# Altium PCB STM32_Board_1.PcbDoc
Units mm, origin at the board's own origin, x right, y up, seen from the top; angles counter-clockwise.
Board outline 39.24 x 39.7 mm, 4 copper layers (L1 (Signal), L2 (GND), L3 (GND), L4 (Signal)), stack 1.57 mm thick; 36 components, 28 nets, 172 pads, 44 vias.
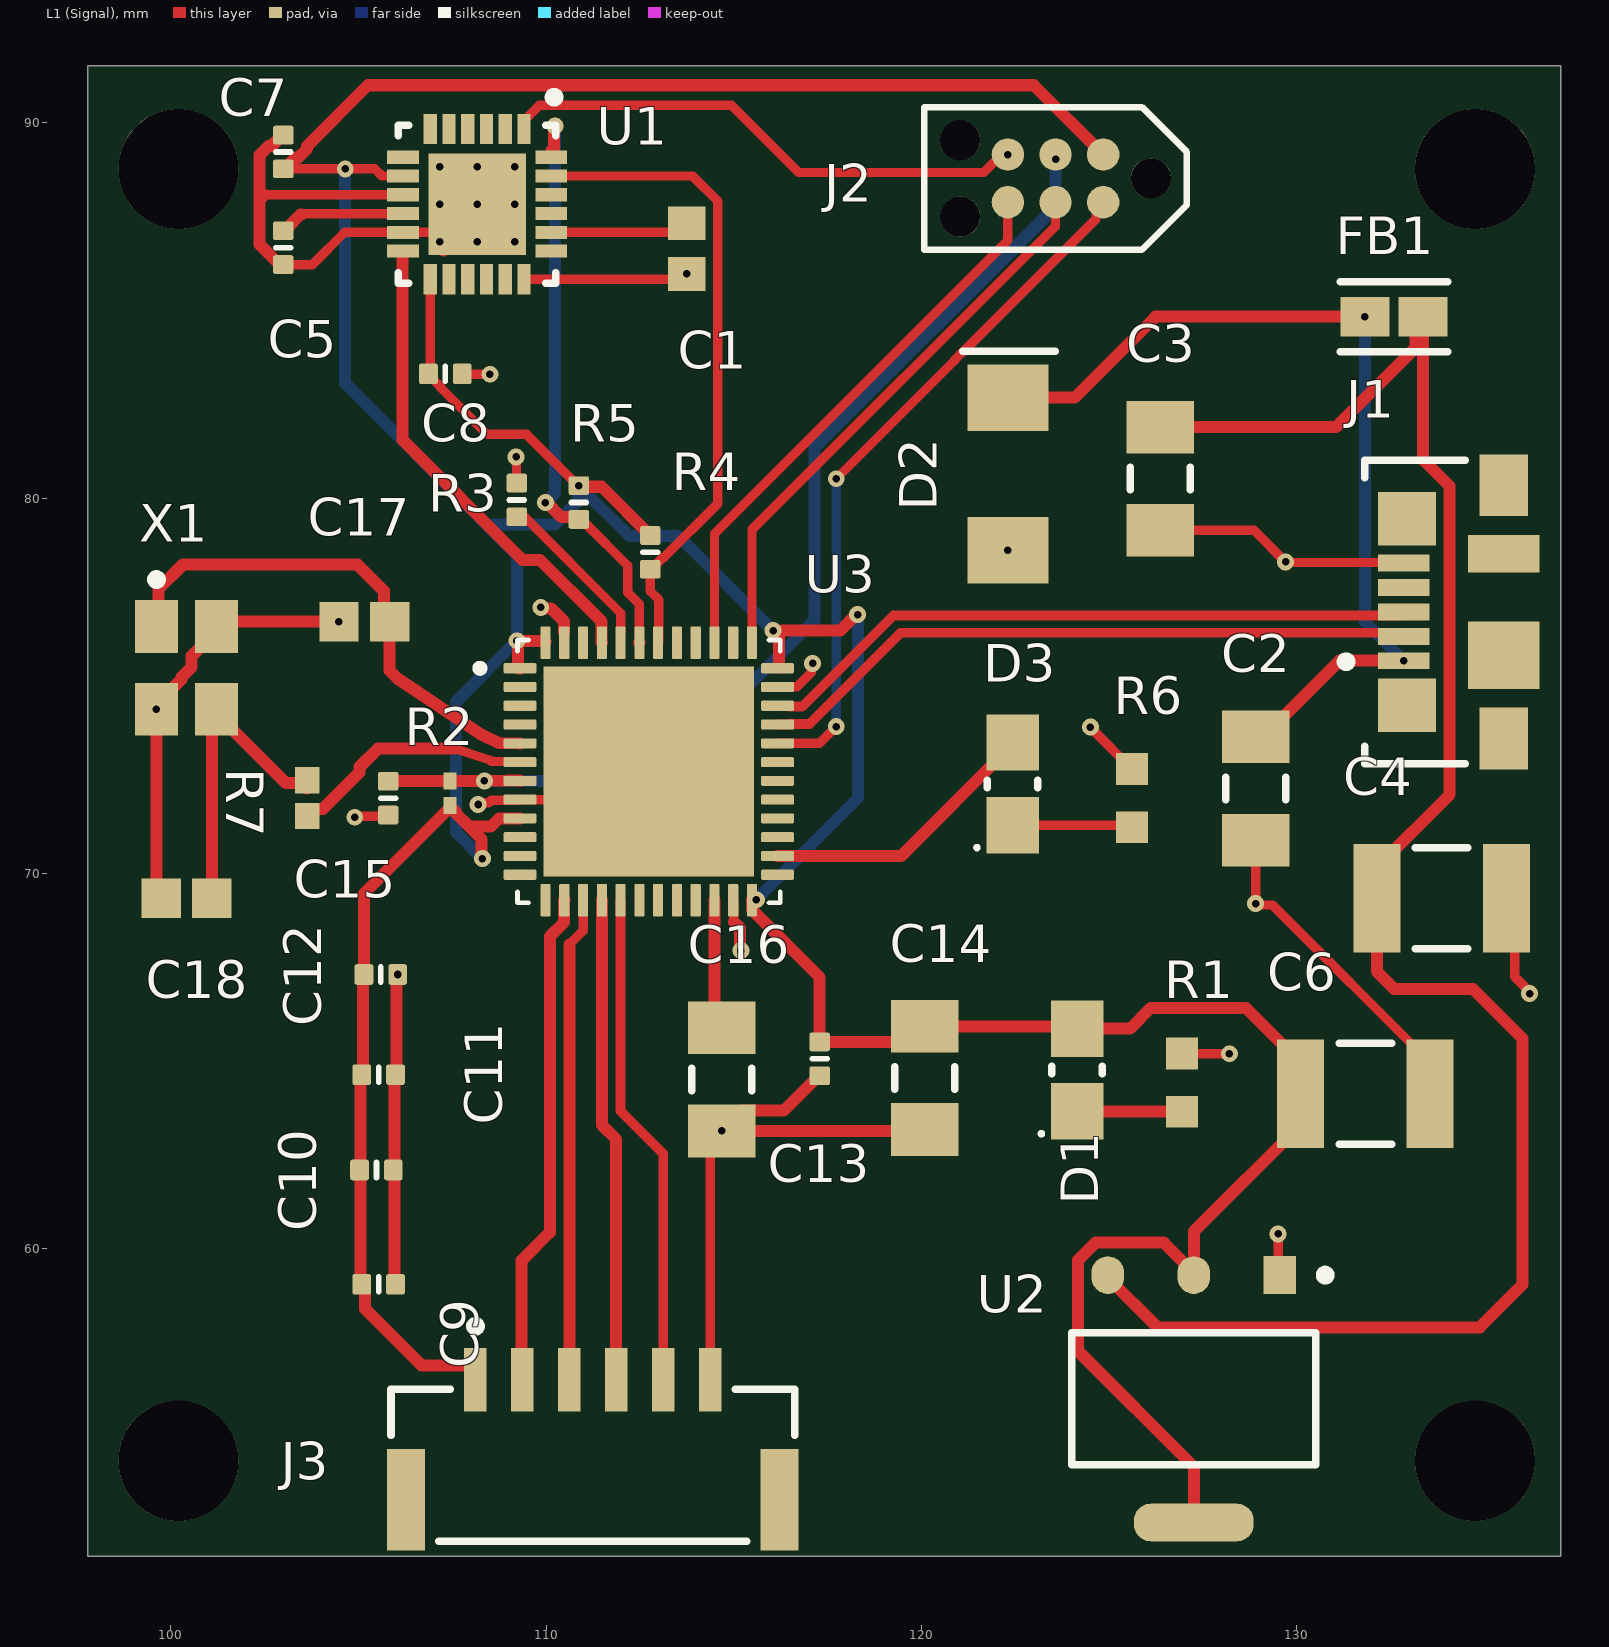
[diagram p0: L1 (Signal) view]
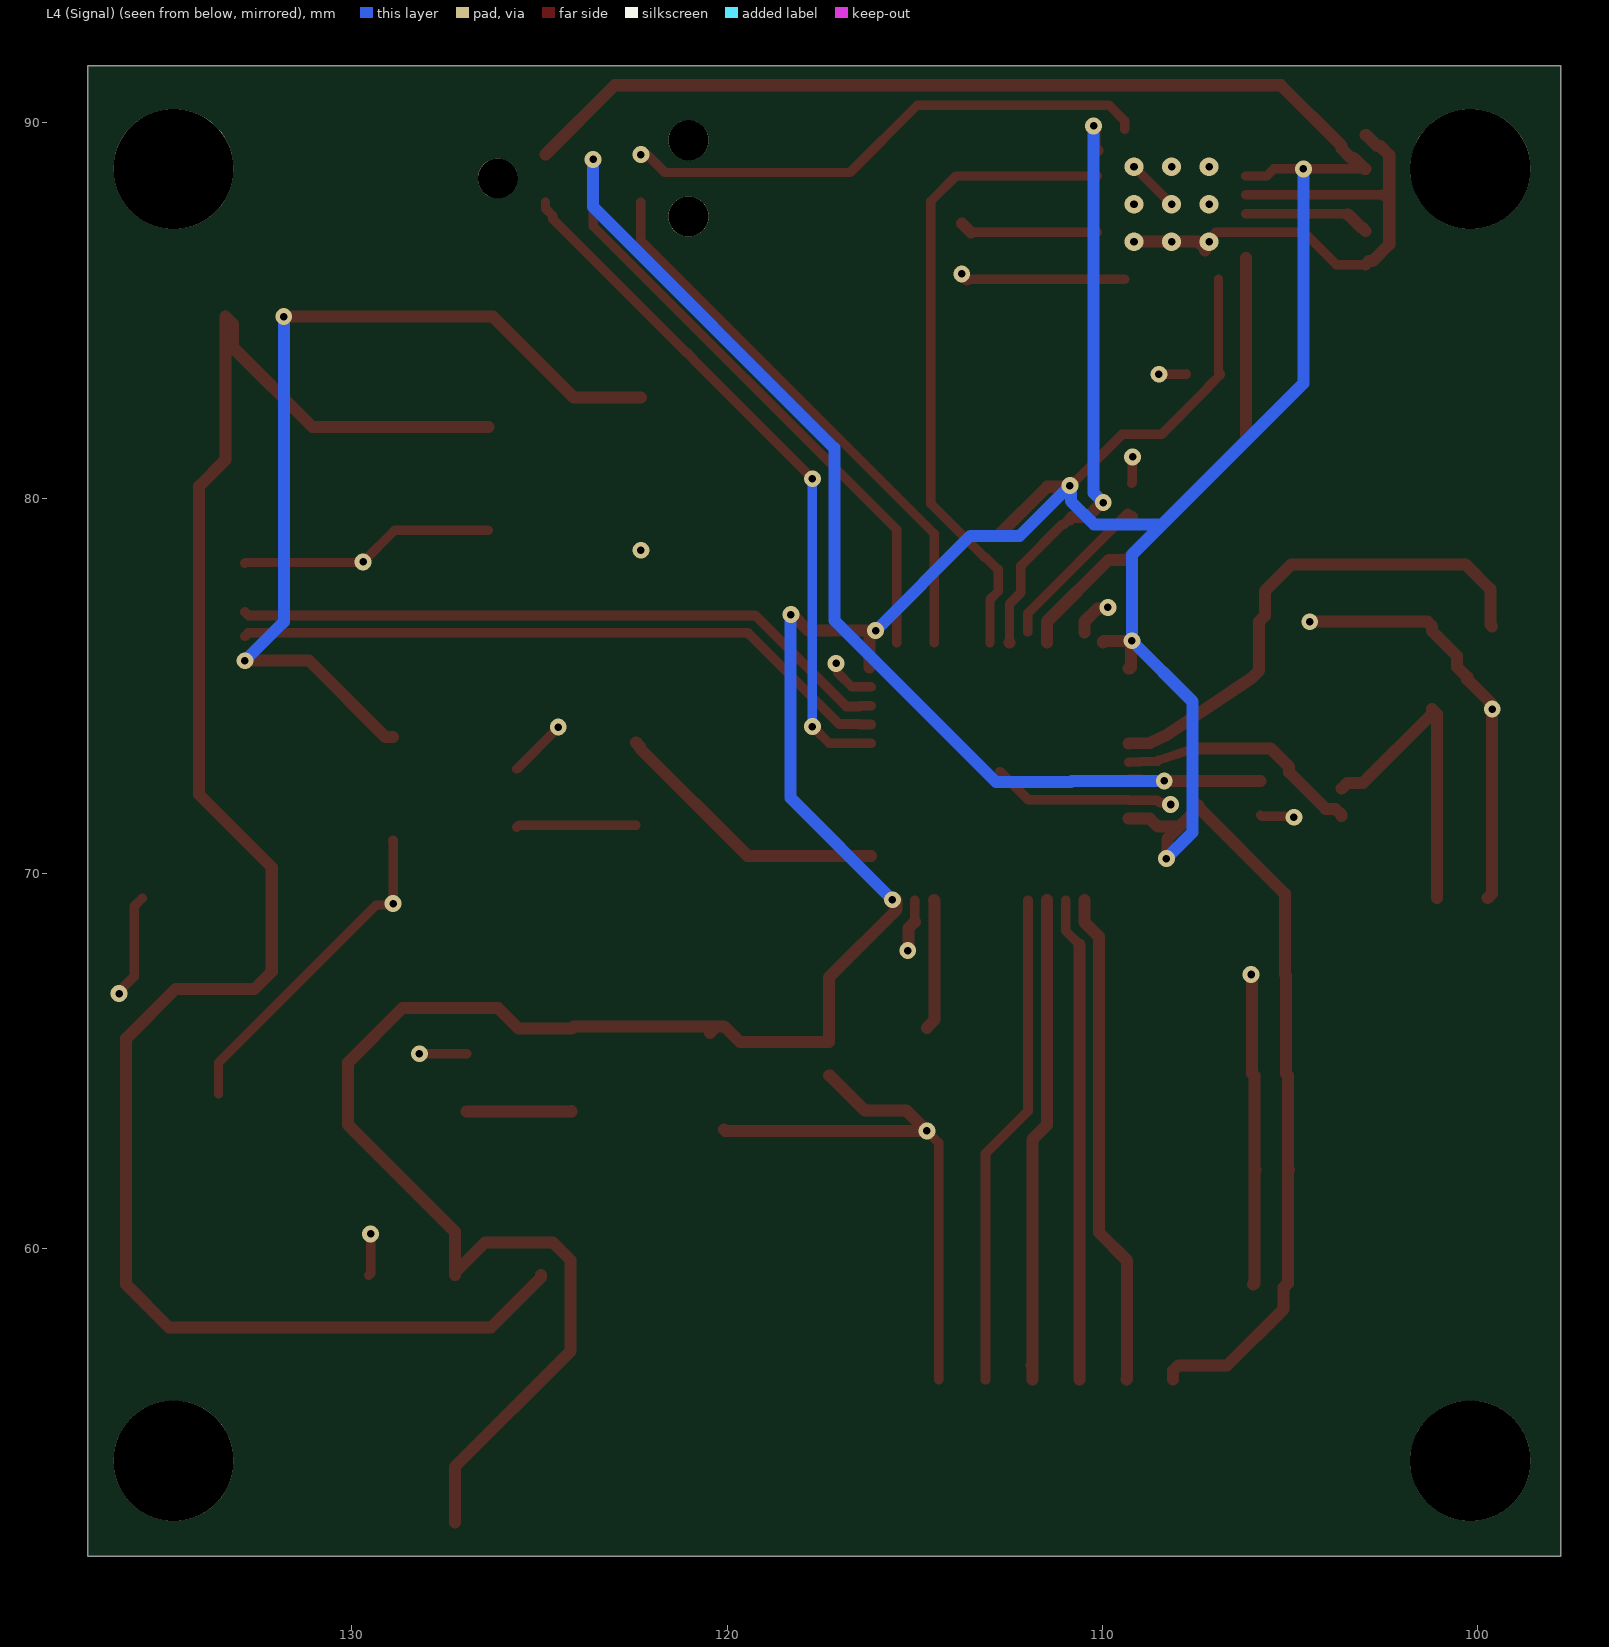
[diagram p1: L4 (Signal) view, seen from below]
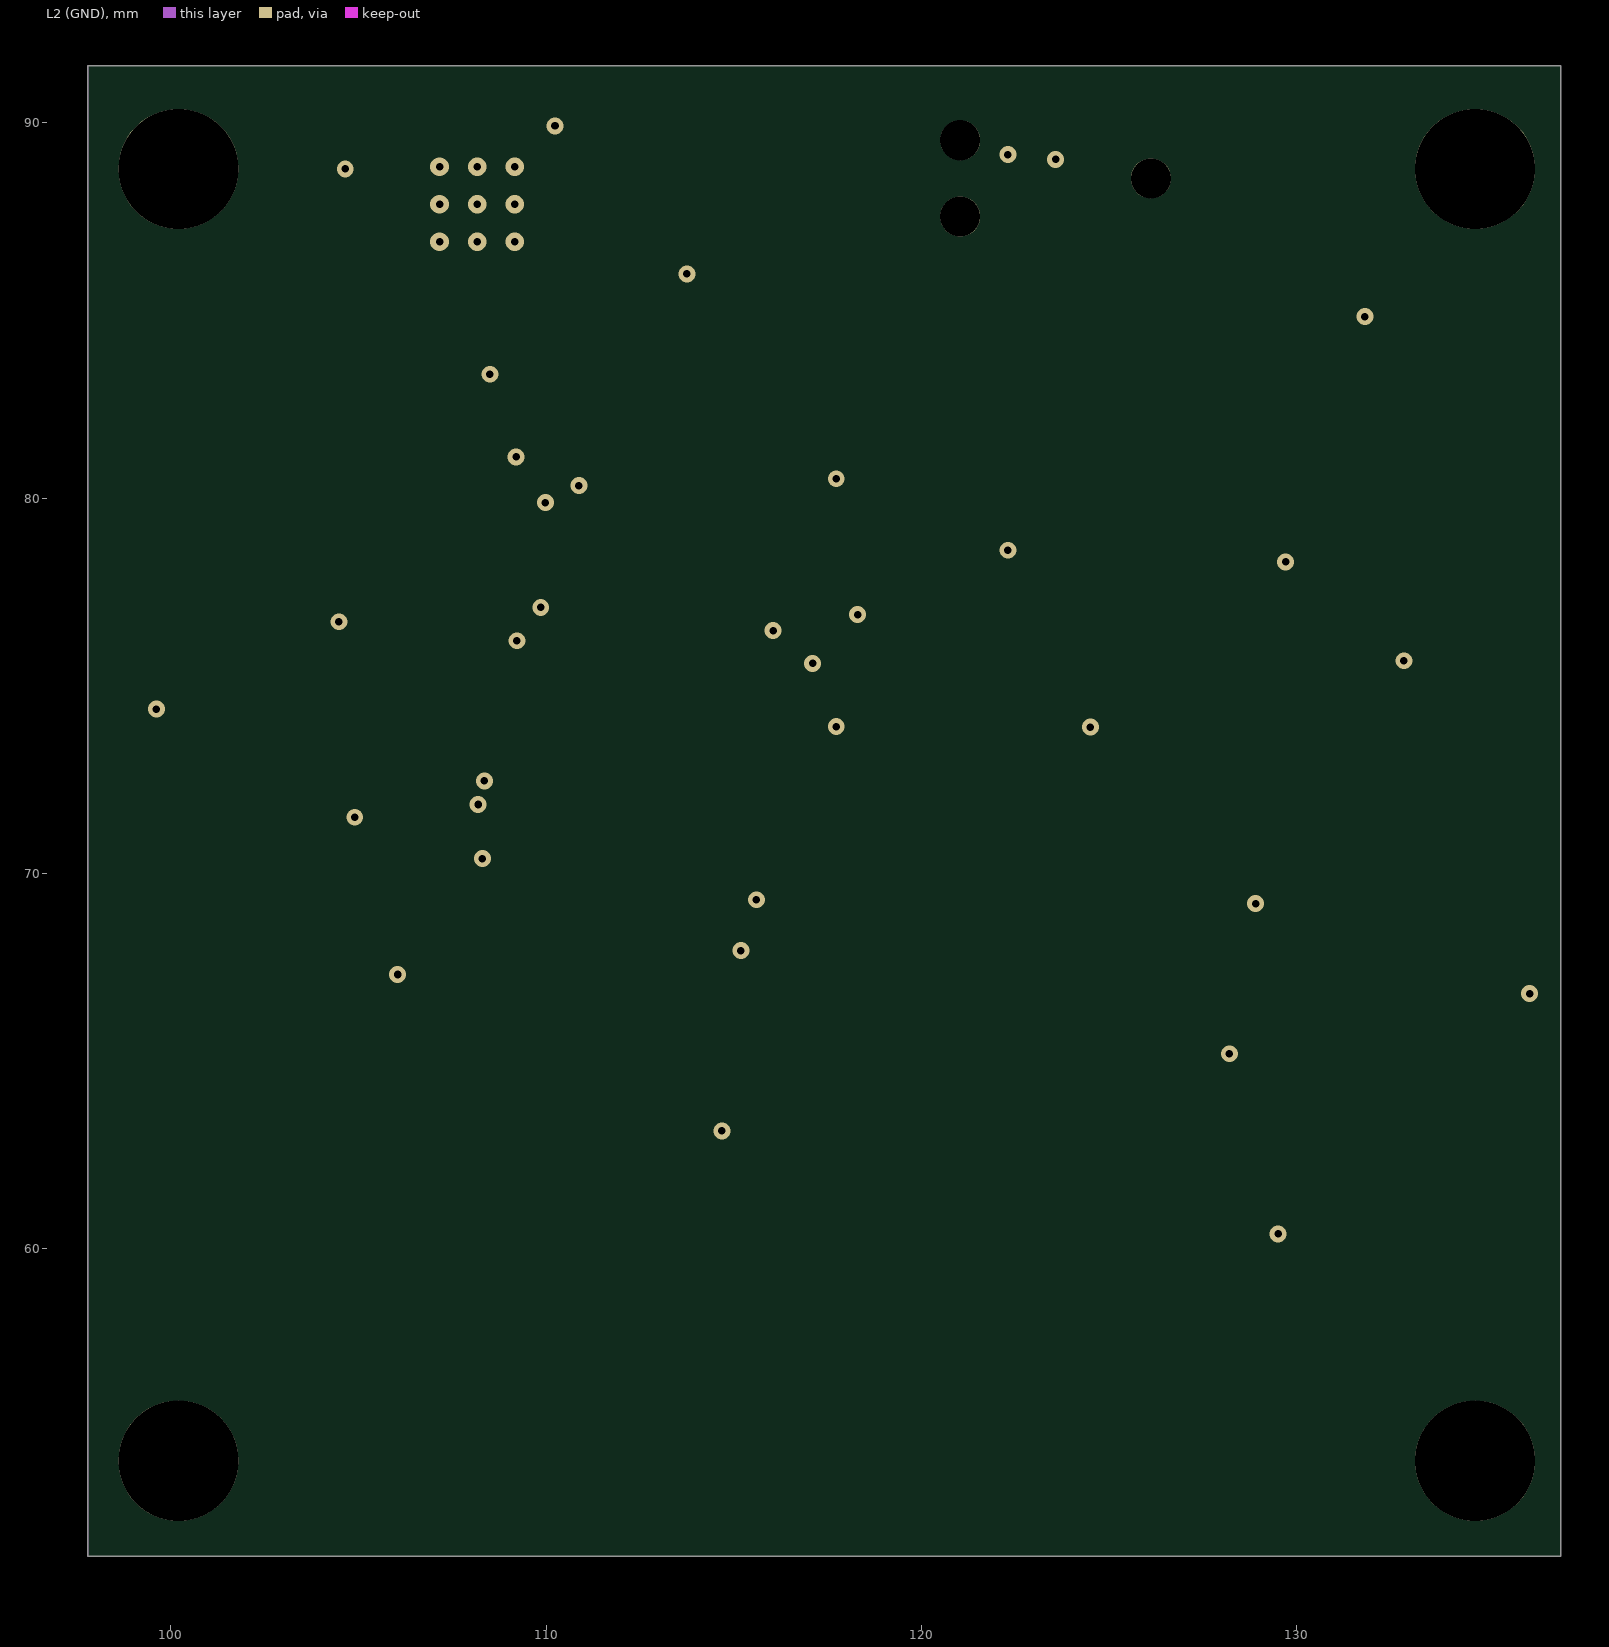
[diagram p2: L2 (GND)]
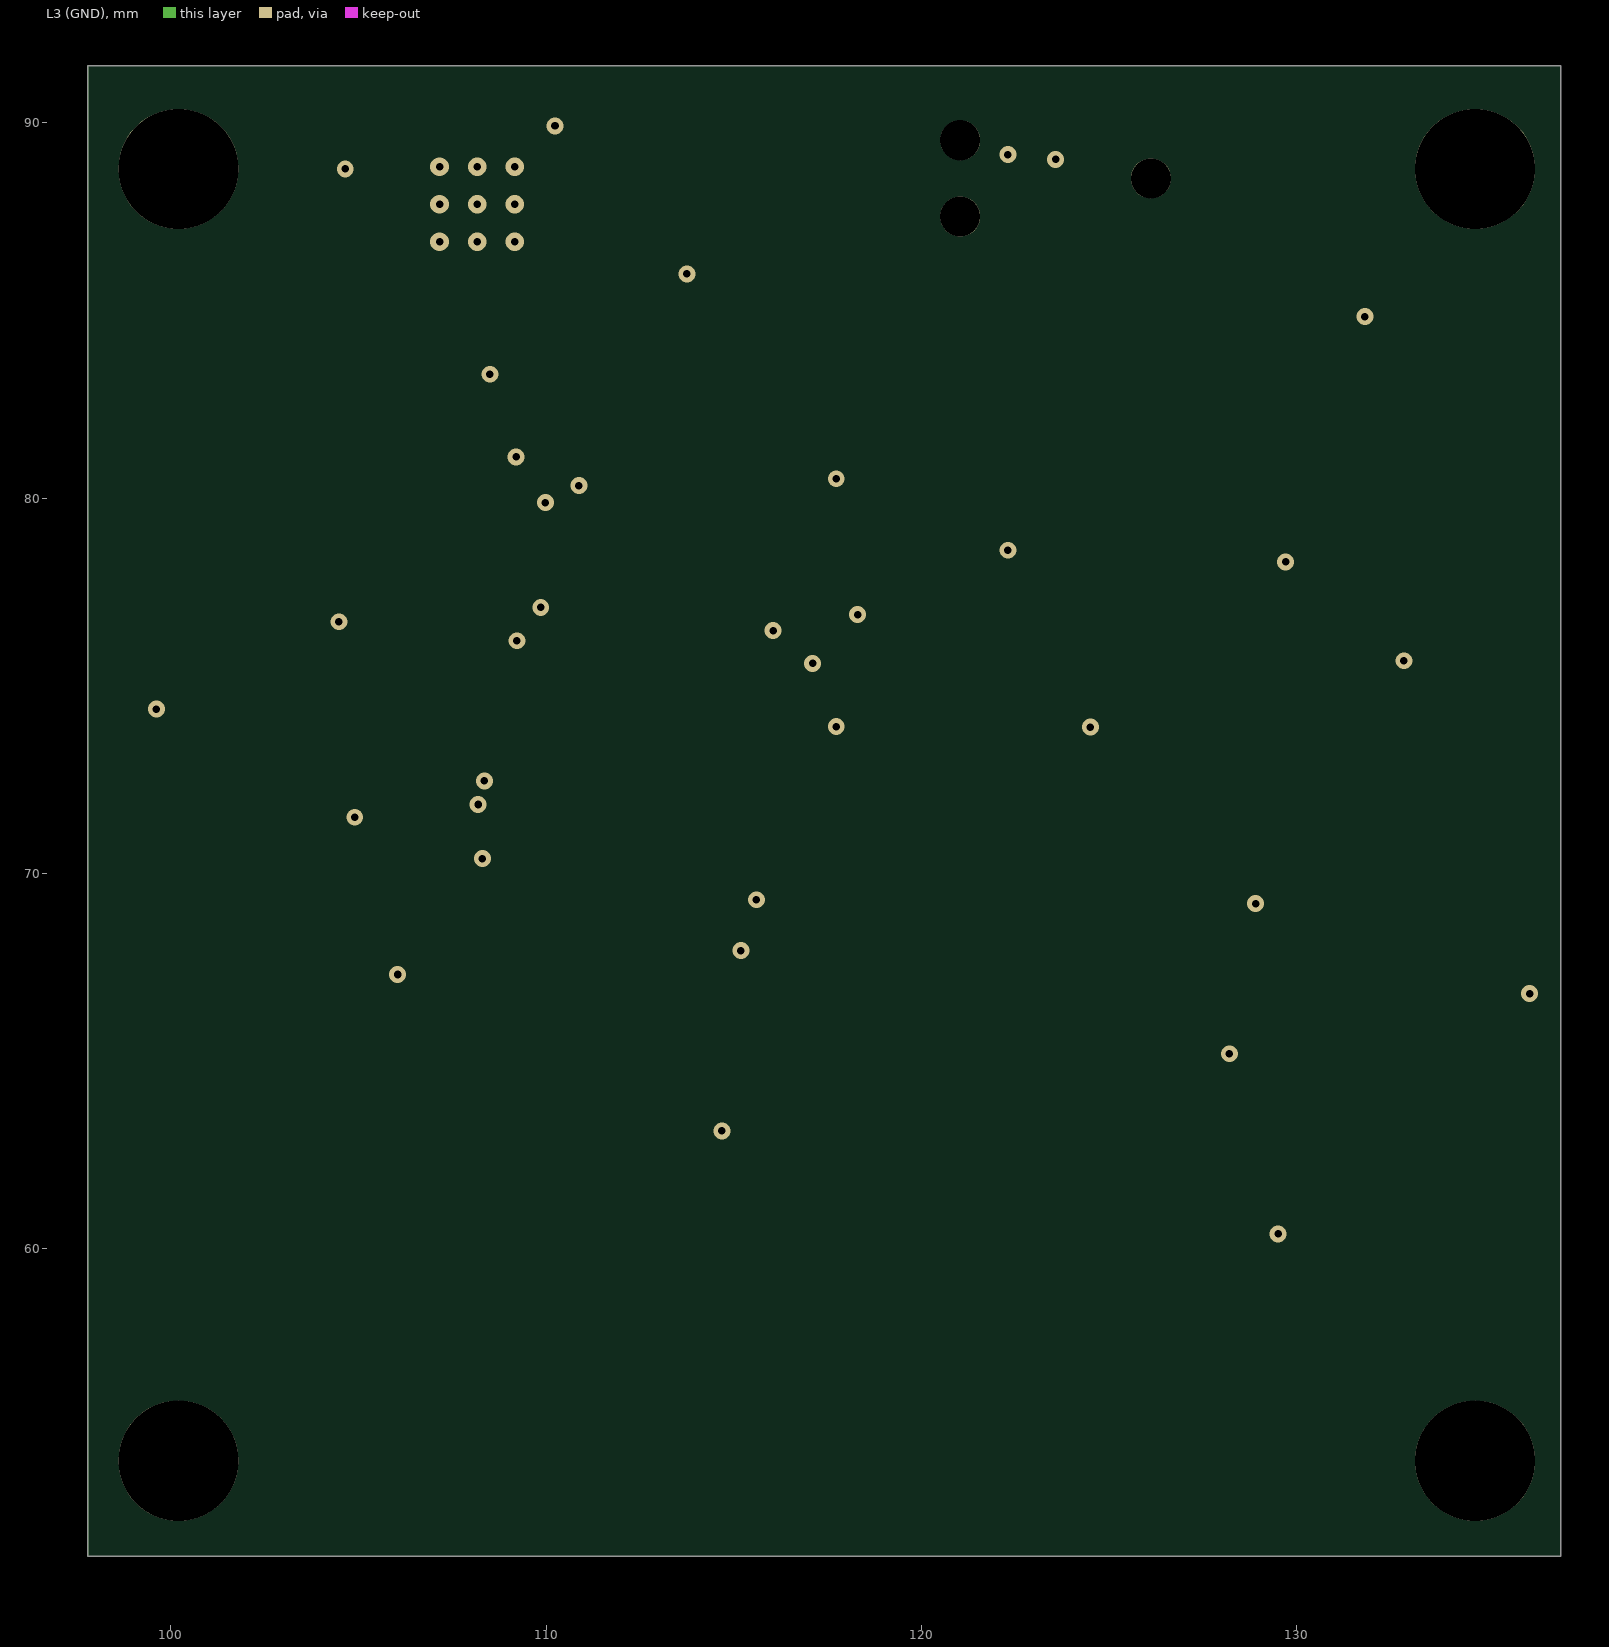
[diagram p3: L3 (GND)]
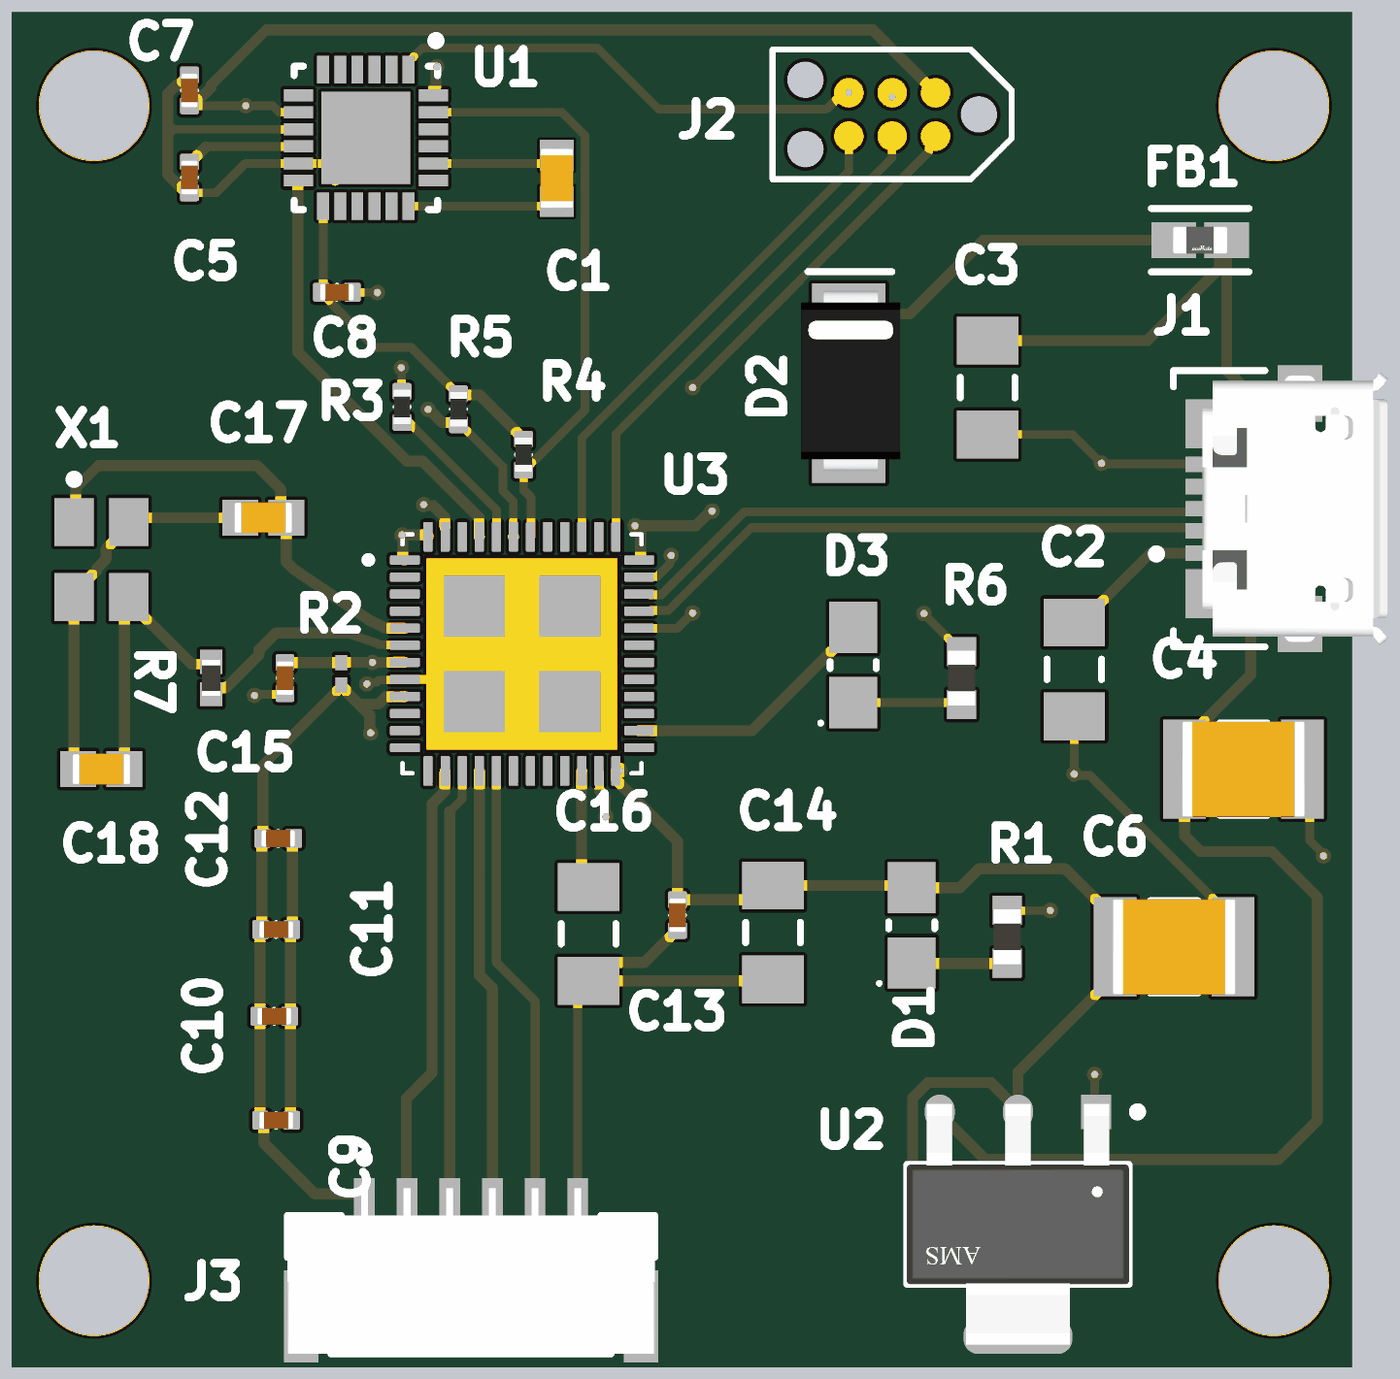
[diagram p4: 3D render of the assembled board from above, using the file's embedded part models]

## Layer stack, top to bottom
Top Solder: solder mask 0.0254, SM-001, Dk 4
L1 (Signal): signal copper 0.035
Dielectric 1: prepreg 0.2, PP-017, Dk 4.6
L2 (GND): signal copper 0.0175
Dielectric 3: core 1.065, Core-039, Dk 4.6
L3 (GND): signal copper 0.0175
Dielectric 5: prepreg 0.2, PP-017, Dk 4.6
L4 (Signal): signal copper 0.035
Bottom Solder: solder mask 0.0254, SM-001, Dk 4

## Board outline
97.79,51.816 97.79,91.518 137.033,91.518 137.033,51.816

## Design rules (kind name [scope] priority, off if disabled: settings)
Clearance [All] p1: gap=0.2 ignorepadtopadclearanceinfootprint=TRUE
DiffPairsRouting [All] p1: maxlimit=0.254 minlimit=0.203 mostfreqgap=0.254 toplayer_maxgap=0.203 toplayer_prefgap=0.203 toplayer_minwidth=0.26 toplayer_maxwidth=0.26 toplayer_prefwidth=0.26 bottomlayer_maxgap=0.203 bottomlayer_prefgap=0.203 bottomlayer_minwidth=0.26 bottomlayer_maxwidth=0.26 bottomlayer_prefwidth=0.26 impedanceprofiledriven=TRUE impedanceprofileid={F57E4FC6-F81B-4122-8872-428C1FC6BF5A} impedanceprofilevalue=90.000000 maxuncoupledlength=12.7
PolygonConnect [All] p1: connectstyle=Direct reliefconductorwidth=0.254 reliefentries=4 polygonreliefangle="90 Angle" airgapwidth=0.254
RoutingVias [All] p1: holewidth=0.3 width=0.7 viastyle="Through Hole" minholewidth=0.25 minwidth=0.55 maxholewidth=0.4 maxwidth=0.9
SolderMaskExpansion [All] p1: expansion=0.102 istentingtop=FALSE
UnRoutedNet [All] p1: checkbadconnections=TRUE
Width [All] p1: maxlimit=1 minlimit=0.2 preferedwidth=0.3 toplayer_maxwidth=0.32 toplayer_prefwidth=0.25 midlayer1_minwidth=0.254 midlayer1_maxwidth=0.254 midlayer1_prefwidth=0.254 midlayer2_minwidth=0.254 midlayer2_maxwidth=0.254 midlayer2_prefwidth=0.254 minimp=50.000000 maximp=50.000000 favimp=50.000000
28 further rules are at their usual default settings.

## Classes and differential pairs
component class STM32_Schematic: C1 C2 C3 C4 C5 C6 C7 C8 C9 C10 C11 C12 C14 C15 C17 C18 D1 D2 D3 FB1 J1 J2 J3 R1 R2 R3 R4 R5 R6 R7 U1 U2 U3 X1
differential pair USB_D: +USB_D_P -USB_D_N

## Components (designator, comment, footprint, x,y, rotation, side; value= is the part's Value field where it differs from the comment)
C1 "CAP CER 0603 2200PF 10% X7R" "CAP, 0603" 113.75,86.649 r270 top
C2 "CAP CER 2.2UF 100V ±20% X7R 1206" "CAP, 1206" 128.905,72.263 r270 top value=2.2µF
C3 "CAP CER 2.2UF 100V ±20% X7R 1206" "CAP, 1206" 126.365,80.518 r270 top value=2.2µF
C4 "CGA6P1X7R1C226M250AC" "CAP, 1210" 133.858,69.342 r0 top value=22µF
C5 "Capacitor 100nF +/-20% 50V 0402" CAPC0402(1005)60_L 102.997,86.672 r90 top value=100nF
C6 "CGA6P1X7R1C226M250AC" "CAP, 1210" 131.826,64.135 r0 top value=22µF
C7 "Capacitor 100nF +/-20% 50V 0402" CAPC0402(1005)60_L 102.997,89.223 r270 top value=100nF
C8 "Capacitor 100nF +/-20% 50V 0402" CAPC0402(1005)60_L 107.315,83.312 r180 top value=100nF
C9 "Capacitor 100nF +/-20% 50V 0402" CAPC0402(1005)60_L 105.537,59.055 r180 top value=100nF
C10 "Capacitor 100nF +/-20% 50V 0402" CAPC0402(1005)60_L 105.479,62.103 r180 top value=100nF
C11 "Capacitor 100nF +/-20% 50V 0402" CAPC0402(1005)60_L 105.537,64.643 r180 top value=100nF
C12 "Capacitor 100nF +/-20% 50V 0402" CAPC0402(1005)60_L 105.595,67.31 r180 top value=100nF
C13 "Capacitor 100nF +/-20% 50V 0402" CAPC0402(1005)60_L 117.287,65.064 r90 top value=100nF
C14 "CAP CER 2.2UF 100V ±20% X7R 1206" "CAP, 1206" 120.081,64.556 r270 top value=2.2µF
C15 "Capacitor 100nF +/-20% 50V 0402" CAPC0402(1005)60_L 105.791,72.009 r90 top value=100nF
C16 "CAP CER 2.2UF 100V ±20% X7R 1206" "CAP, 1206" 114.681,64.516 r90 top value=2.2µF
C17 "Capacitor 10 pF +/- 5% 50 V 0603" CAPC1608X90X40ML10T20 105.156,76.708 r0 top value=10pF
C18 "Capacitor 10 pF +/- 5% 50 V 0603" CAPC1608X90X40ML10T20 100.417,69.342 r0 top value=10pF
D1 "LED WHITE 3.2V 20mA 0805" "LED 0805" 124.145,64.767 r90 top
D2 "DIODE TVS 5VWM 9.1VC DO-214AA (SMB)" "DO-214AA Diode" 122.301,78.613 r90 top
D3 "" "LED 0805" 122.428,72.39 r90 top
FB1 "BLM18EG121SH1D" FP-BLM18-0_15-t0_8-IPC_A 132.588,84.836 r0 top
J1 "473460001" FP-473460001-MFG 135.159,76.969 r90 top
J2 "TC2030-FP" "New footprint 1" 123.571,88.519 r180 top
J3 "SM06B-GHS-TB(LF)(SN)" FP-SM06B-GHS-TB_LF_SN-MFG 111.242,54.24 r0 top
R1 "RES 1K OHM 5% 1/10W 0603" "RES, 0603" 126.939,64.429 r270 top
R2 "ERJ-1GEJ103C" RESC0603X26X15NL03T05 107.442,72.136 r270 top
R3 "Resistor 10K  +/-1 % 0402 63 mW" RESC0402(1005)_L 109.22,79.952 r90 top value=10k
R4 "Resistor 2K2  +/-5 % 0402 63 mW" RESC0402(1005)_L 112.776,78.555 r90 top value=2.2k
R5 "Resistor 2K2  +/-5 % 0402 63 mW" RESC0402(1005)_L 110.871,79.883 r90 top value=2.2k
R6 "RES 1K OHM 5% 1/10W 0603" "RES, 0603" 125.603,72.009 r90 top
R7 "Resistor 0R 0402 63 mW" RESC1005X40X25ML05T10 103.632,72.009 r270 top value=0
U1 "MPU6050" INSE-QFN-24_V 108.162,87.832 r270 top
U2 "AMS1117-3.3" FP-AMS1117-IPC_C 127.254,56.007 r270 top
U3 "STM32F411CEU6" QFN50P700X700X60-49N 112.734,72.719 r0 top
X1 "TSX-3225 24.0000MF15X-AC3" EPSON-TSX-3225_V 100.419,75.481 r270 top

## Footprints (in the part's own frame and the unit in brackets; to place one, negate y for a bottom-side part, rotate by r counter-clockwise, add the part's x,y. Pads: shape width x height; smd on the part's side, far side on the other; paste and mask are expansions set on the pad)
"CAP, 0603" [mm] "Chip Capacitor, 2-Leads, Body 1.60x0.81mm, IPC Medium Density"
  rect 0.9x1 smd mask+0.076: 1(-0.675,0) 2(0.675,0)
  body extent -0.87,-0.48 0.87,0.48, height 0.9
"CAP, 1206" [mm] "Chip Capacitor, 2-Leads, Body 3.20x1.60mm, IPC Medium Density"
  rect 1.4x1.8 smd: 1(-1.375,0) 2(1.375,0)
  silkscreen extent -0.3,-0.8 0.3,0.8, body extent -1.68,-0.87 1.67,0.87, height 1.8
"CAP, 1210" [mm] "Chip Capacitor, 2-Leads, Body 3.20x2.50mm, IPC Low Density"
  rect 1.25x2.9 smd: 1(-1.725,0) 2(1.725,0)
  silkscreen extent -0.7,-1.35 0.7,1.35, body extent -1.8,-1.4 1.8,1.4, height 2.8
CAPC0402(1005)60_L [mm] "Chip Capacitor, Body 1.0x0.5mm, Height 0.6mm, IPC High Density"
  rrect25% 0.5x0.55 smd: 1(-0.45,0) 2(0.45,0)
  silkscreen extent 0,-0.2 0,0.2, body extent -0.5,-0.25 0.5,0.25, height 0.6
CAPC1608X90X40ML10T20 [mm] "Chip Capacitor, 2-Leads, Body 1.70x0.90mm, IPC Low Density"
  rect 1.05x1.05 smd: 1(-0.675,0) 2(0.675,0)
  body extent -0.85,-0.45 0.85,0.45, height 0.9
"DO-214AA Diode" [mil] "Zener Diode 16V 5W SMBJ5353B-TP"
  rect 70x85 smd: 1(0,0) 2(160,0)
  silkscreen extent 209,-50 209,47, body extent -21,-60 187,55, height 95
EPSON-TSX-3225_V [mm] "SMD, 4-Leads, Body 3.2x2.5mm"
  rect 1.4x1.15 smd: 1(-1.1,-0.8) 2(1.1,-0.8) 3(1.1,0.8) 4(-1.1,0.8)
  silkscreen extent -2.47,-0.92 -2.23,-0.67, body extent -1.6,-1.25 1.6,1.25, height 0.6
FP-473460001-MFG [mm]
  rect 0.45x1.38 smd paste+0 mask+0: 1(-1.3,2.31) 2(-0.65,2.31) 3(0,2.31) 4(0.65,2.31) 5(1.3,2.31)
  rect 1.425x1.55 smd paste+0 mask+0: 6(-2.488,2.225) 7(2.488,2.225)
  rect 1.65x1.3 smd paste+0 mask+0: 8(-3.375,-0.35) 11(3.375,-0.35)
  rect 1.8x1.9 smd paste+0 mask+0: 9(-1.15,-0.35)
  rect 1x1.9 smd paste+0 mask+0: 10(1.55,-0.35)
  silkscreen extent -4.05,0.67 4.05,3.97, body extent -4.3,-2.48 4.3,3.45, height 0.25
FP-AMS1117-IPC_C [mm]
  rect 1.004x0.872 smd paste+0 mask+0: 1(-3.295,2.29)
  rrect100% 1.004x0.872 smd paste+0 mask+0: 2(-3.295,0) 3(-3.295,-2.29)
  rrect87% 1.004x3.182 smd paste+0 mask+0: 4(3.295,0)
  silkscreen extent -3.42,-3.25 1.75,3.63, body extent -3.9,-3.35 3.9,3.35, height 0.25
FP-BLM18-0_15-t0_8-IPC_A [mm]
  rect 1.306x1.058 smd paste+0 mask+0: 1(-0.776,0) 2(0.776,0)
  silkscreen extent -1.43,-0.93 1.43,0.93, body extent -1.93,-1.03 1.93,1.03, height 0.25
FP-SM06B-GHS-TB_LF_SN-MFG [mm]
  rect 0.6x1.7 smd paste+0 mask+0: 1(-3.125,2.275) 2(-1.875,2.275) 3(-0.625,2.275) 4(0.625,2.275) 5(1.875,2.275) 6(3.125,2.275)
  rect 1x2.7 smd paste+0 mask+0: 7(-4.975,-0.925) 8(4.975,-0.925)
  silkscreen extent -5.38,-2.02 5.38,3.82, body extent -5.58,-2.37 5.58,3.22, height 0.25
INSE-QFN-24_V [mm] "QFN, 24-Leads, Body 4.00x4.00mm, Pitch 0.50mm, Thermal Pad 2.7x2.6mm"
  rect 0.8x0.35 smd: 1(-2,1.25) 2(-2,0.75) 3(-2,0.25) 4(-2,-0.25) 5(-2,-0.75) 6(-2,-1.25) 13(2,-1.25) 14(2,-0.75) 15(2,-0.25) 16(2,0.25) 17(2,0.75) 18(2,1.25)
  rect 0.35x0.85 smd: 7(-1.25,-1.975) 8(-0.75,-1.975) 9(-0.25,-1.975) 10(0.25,-1.975) 11(0.75,-1.975) 12(1.25,-1.975) 19(1.25,1.975) 20(0.75,1.975) 21(0.25,1.975) 22(-0.25,1.975) 23(-0.75,1.975) 24(-1.25,1.975)
  rect 2.7x2.6 smd: 25(0,0)
  silkscreen extent -2.97,-2.1 2.1,2.18, body extent -2,-2 2,2, height 0.95
"LED 0805" [mm] "Molded Diode, 2-Leads, Body 2.00x1.25mm, IPC Medium Density"
  rect 1.5x1.4 smd: 1(-1.1,0) 2(1.1,0)
  silkscreen extent -1.75,-0.67 0.1,1, body extent -1,-0.62 1,0.62
"New footprint 1" [mil]
  round 33.98 smd paste-16.99: 1(-50,-25) 2(-50,25) 3(0,-25) 4(0,25) 5(50,-25) 6(50,25)
  round 42.01 hole 42.01 unplated: MH(-100,0) MH(100,-40) MH(100,40)
  silkscreen extent -138,-75 138,75
QFN50P700X700X60-49N [mm]
  rrect25% 0.87x0.27 smd: 1(-3.43,2.75) 2(-3.43,2.25) 3(-3.43,1.75) 4(-3.43,1.25) 5(-3.43,0.75) 6(-3.43,0.25) 7(-3.43,-0.25) 8(-3.43,-0.75) 9(-3.43,-1.25) 10(-3.43,-1.75) 11(-3.43,-2.25) 12(-3.43,-2.75) 25(3.43,-2.75) 26(3.43,-2.25) 27(3.43,-1.75) 28(3.43,-1.25) 29(3.43,-0.75) 30(3.43,-0.25) 31(3.43,0.25) 32(3.43,0.75) 33(3.43,1.25) 34(3.43,1.75) 35(3.43,2.25) 36(3.43,2.75)
  rrect25% 0.27x0.87 smd: 13(-2.75,-3.43) 14(-2.25,-3.43) 15(-1.75,-3.43) 16(-1.25,-3.43) 17(-0.75,-3.43) 18(-0.25,-3.43) 19(0.25,-3.43) 20(0.75,-3.43) 21(1.25,-3.43) 22(1.75,-3.43) 23(2.25,-3.43) 24(2.75,-3.43) 37(2.75,3.43) 38(2.25,3.43) 39(1.75,3.43) 40(1.25,3.43) 41(0.75,3.43) 42(0.25,3.43) 43(-0.25,3.43) 44(-0.75,3.43) 45(-1.25,3.43) 46(-1.75,3.43) 47(-2.25,3.43) 48(-2.75,3.43)
  rect 5.6x5.6 smd paste-4: 49(0,0)
  silkscreen extent -4.6,-3.5 3.5,3.5
"RES, 0603" [mm] "Chip Resistor, 2-Leads, Body 1.60x0.80mm, IPC Medium Density"
  rect 0.85x0.85 smd: 1(-0.775,0) 2(0.775,0)
  body extent -0.8,-0.4 0.8,0.4, height 0.55
RESC0402(1005)_L [mm] "Chip Resistor, Body 1.0x0.5mm, IPC High Density"
  rrect25% 0.5x0.55 smd: 1(-0.45,0) 2(0.45,0)
  silkscreen extent 0,-0.2 0,0.2, body extent -0.5,-0.25 0.5,0.25, height 0.3
RESC0603X26X15NL03T05 [mm] "Chip Resistor, 2-Leads, Body 0.60x0.30mm, IPC Medium Density"
  rect 0.45x0.35 smd: 1(-0.325,0) 2(0.325,0)
  body extent -0.32,-0.16 0.32,0.17, height 0.26
RESC1005X40X25ML05T10 [mm] "Chip Resistor, 2-Leads, Body 1.05x0.55mm, IPC Low Density"
  rect 0.7x0.65 smd: 1(-0.475,0) 2(0.475,0)
  body extent -0.53,-0.28 0.53,0.28, height 0.4

## Part data
C1: library part CMP-001-00089-2, "±10% 50V Ceramic Capacitor X7R 0603 (1608 Metric)", Capacitance=2.2nF, Case Code (Imperial)=0603, Case Code (Metric)=1608, Dielectric=X7R, Dielectric Material=Ceramic, Manufacturer Part Number=C0603C222K5RAC7411, Max Operating Temperature=125°C, Min Operating Temperature=-55°C, Supplier Part Number=399-17586-1-ND, Tolerance=10%, Voltage Rating=50V, Case/Package=0603, Depth=0.8mm, Dissipation Factor=2.5%, Height=0.8mm, Lead Pitch=0.7mm, Length=1.6mm, Mount="Surface Mount", Radiation Hardening=No, Termination=SMD/SMT, Voltage Rating (DC)=50V, Width=0.8mm
C2 C3 C14 C16: library part CMP-013-0032-2, "2.2µF ±20% 100V Ceramic Capacitor X7R 1206 (3216 Metric)", Manufacturer 1="TDK Corporation", Manufacturer Part Number 1=CGA5L3X7S2A225M160AB, Operating Temperature="-55°C ~ 125°C", Package / Case="1206 (3216 Metric)", Ratings=-, Supplier Part Number 1=445-12947-1-ND, Temperature Coefficient=X7R, Tolerance=20%, Voltage=100V, ComponentLink1Description=http://www.murata.com/~/media/webrenewal/support/library/catalog/products/capacitor/mlcc/c02e.ashx, ComponentLink1URL=http://www.murata.com/~/media/webrenewal/support/library/catalog/products/capacitor/mlcc/c02e.ashx, Design Item ID="CAP CER 2.2UF 100V ±20% X7R 1206", Height - Seated (Max)=-, Lead Spacing=-, Lead Style=-, Mounting Type="Surface Mount, MLCC", Packaging="Cut Tape (CT)", Part Status=Active, Size / Dimension="0.126\" L x 0.063\" W (3.20mm x 1.60mm)", Source="Schematic Diagrams.SchLib", Supplier 1=Digi-key, Thickness (Max)="0.071\" (1.80mm)"
C4 C6: library part CMP-001-00094-1, "CAP CER 22UF 16V X7R 1210", Capacitor Type=Ceramic, Case/Package=1210, Max Operating Temperature=125°C, Min Operating Temperature=-55°C, Voltage Rating=16V, Pins=2, RoHS Compliant=Yes
C5 C7 C8 C9 C10 C11 C12 C13 C15: library part CMP-001-00067-3, "Chip Capacitor, 100nF +/-20%, 50V, 0402, Thickness 0.6 mm", Case/Package=0402, Max Operating Temperature=85°C, Min Operating Temperature=-55°C, Tolerance=10%, Voltage Rating=50V, Mounting Technology=SMT, Pins=2
C17 C18: library part CMP-001-00014-5, "Chip Capacitor, 10 pF, +/- 5%, 50 V, 0603 (1608 Metric)", Capacitor Type=Ceramic, Case/Package=0603, Max Operating Temperature=125°C, Min Operating Temperature=-55°C, Tolerance=5%, Voltage Rating=50V, Mounting Technology=SM, Pins=2, RoHS Compliant=True
D1: library part CMP-004-00053-1, "2.0(L)X1.3(W)X0.8(H) Mm White Le", Manufacturer=Inolux, Manufacturer Part Number=B1701TW--20P000314U1930, Design Item ID="LED WHITE 3.2V 20mA 0805", RoHS=No, Source=Local.SchLib
D2: library part CMP-014-0015-1, "TVS DIODE 5V 9.1V DO214AA", Capacitance @ Frequency=-, Current - Peak Pulse (10/1000µs)=65.9A, Manufacturer="Vishay Semiconductor Diodes Division", Manufacturer Part Number=SMBJ5.0D-M3/H, Operating Temperature="-55°C ~ 150°C (TJ)", Package / Case="DO-214AA, SMB", Power - Peak Pulse=600W, Power Line Protection=No, Supplier Device Package="DO-214AA (SMBJ)", Voltage - Breakdown (Min)=6.5V, Voltage - Clamping (Max) @ Ipp=9.1V, Voltage - Reverse Standoff (Typ)=5V, Applications="General Purpose", ComponentLink1Description=http://www.vishay.com/docs/87606/87606.pdf, ComponentLink1URL=http://www.vishay.com/docs/87606/87606.pdf, Design Item ID="DIODE TVS 5VWM 9.1VC DO-214AA (SMB)", Mounting Type="Surface Mount", Packaging="Cut Tape (CT)", Part Status=Active, Pricing 1="1=0.51, 10=0.416, 25=0.3808, 100=0.2833, 250=0.25668 (CAD)", RoHS="RoHS Compliant", Source="Schematic Diagrams.SchLib", Stock 1=6900
D3: library part CMP-004-00053-1, "2.0(L)X1.3(W)X0.8(H) Mm White LeLED WHITE 3.2V 20mA 0805", Manufacturer=Inolux, Manufacturer Part Number=B1701TW--20P000314U1930, Design Item ID="LED WHITE 3.2V 20mA 0805", RoHS=No, Source=Local.SchLib
FB1: library part CMP-06046-002473-1, "Chip Ferrite Bead, 0603, 120Ω @ 100MHz, 0.04Ω, 25%, 2A", Case/Package=0603, DC Resistance (DCR)=40mR, Max DC Current=2A, Max Operating Temperature=125°C, Min Operating Temperature=-55°C, Package Quantity=4000, Test Frequency=100MHz, Tolerance=25%, Depth=0.95mm, Height=0.8mm, Impedance=120R, Length=1.6mm, Number of Circuits=1, Packaging="Tape and Reel", RoHS Compliant=Yes, Series=BLM, Termination=SMD/SMT, Weight=7.1E-05oz, Width=0.8mm
J1: library part CMP-2000-05246-2, "CONN RCPT USB2.0 MICRO B SMD R/A", Current Rating=1.8A, Manufacturer=Molex, Package=0, Temperature="-30°C to +85°C", Temperature Range High=+85°C, Temperature Range Low=-30°C, Voltage Rating=30V, Automotive=No, Category=Conn, ComponentLink2Description=Datasheet, ComponentLink2URL=https://www.molex.com/webdocs/datasheets/pdf/en-us/0473460001_IO_CONNECTORS.pdf, Conn Orientation="Right Angle", Contact Material=Gold,Nickel, Device Class L1=Connectors, Device Class L2="USB Connectors", Device Class L3=unset, Digikey Description="CONN RCPT USB2.0 MICRO B SMD R/A", Footprint Url=https://www.molex.com/pdm_docs/sd/473460001_sd.pdf, Height=2.945mm, Is Female=yes, Lead Free=Yes, Manufacturer Part Number=473460001, Number of Contacts=5, Octopart=https://octopart.com/47346-0001-molex-7164928, Pitch=0.65mm, RoHS=TRUE, Shielding=true, Usb Standard="USB 2.0"
J2: library part CMP-002-00275-1
J3: library part CMP-17439-000061-1, "CONN HEADER SMD R/A 6POS 1.25MM", Color=Natural, Contact Resistance=50mR, Current Rating=1A, Housing Color=Beige, Max Operating Temperature=85°C, Max Voltage Rating (AC)=50V, Min Operating Temperature=-25°C, Connector Type="Outer Shroud Contact", Contact Material=Bronze, Contact Plating=Tin, Depth=4.05mm, Fastening Type=Ramp, Housing Material=Polyamide, Lead Free="Lead Free", Length=10.75mm, Max Current Rating=1A, Mount="Surface Mount", Number of Contacts=6, Number of Positions=6, Number of Rows=1, Orientation="Right Angle", Packaging="Tape and Reel", Pitch=1.25mm, Termination=Solder, Voltage Rating=50V
R1 R6: library part CMP-010-0054-2, "1k Ohm ±5% 0.1W, 1/10W Chip Resistor 0603 (1608 Metric)", Manufacturer 1=Yageo, Manufacturer Part Number 1=RC0603JR-071KL, Operating Temperature="-55°C ~ 155°C", Package / Case="0603 (1608 Metric)", Power (Watts)="0.1W, 1/10W", Resistance (Ohms)=1k, Supplier Device Package=0603, Supplier Part Number 1=311-1.0KGRCT-ND, Temperature Coefficient=±100ppm/°C, Tolerance=5%, ComponentLink1Description=http://www.yageo.com/documents/recent/PYu-RC_Group_51_RoHS_L_7.pdf, ComponentLink1URL=http://www.yageo.com/documents/recent/PYu-RC_Group_51_RoHS_L_7.pdf, Composition="Thick Film", Design Item ID="RES 1K OHM 5% 1/10W 0603", Failure Rate=-, Features="Moisture Resistant", Height - Seated (Max)="0.022\" (0.55mm)", Packaging="Cut Tape (CT)", Part Status=Active, Pricing 1="1=0.15, 10=0.017, 100=0.0071, 1000=0.0032, 2500=0.00278 (CAD)", RoHS="RoHS Compliant", Size / Dimension="0.063\" L x 0.031\" W (1.60mm x 0.80mm)", Source="Schematic Diagrams.SchLib", Stock 1=4415240, Supplier 1=Digi-Key
R2: library part CMP-2004-03146-1, Manufacturer=Panasonic, Part Number=ERJ-1GEJ103C
R3: library part CMP-009-00149-2, "Chip Resistor, 10 kOhms, +/-1 %, 63 mW, -55 to 125 degC, 0402", Case/Package=0402, Max Operating Temperature=155°C, Min Operating Temperature=-55°C, Power=63mW, Tolerance=1%, Pins=2
R4 R5: library part CMP-009-00166-2, "Chip Resistor, 2,2 kOhms, +/-5 %, 63 mW, -55 to 155 degC, 0402", Case/Package=0402, Max Operating Temperature=155°C, Min Operating Temperature=-55°C, Power=63mW, Tolerance=5%, Pins=2
R7: library part CMP-009-00004-4, "Chip Resistor, 0 Ohm, 0.063 W, -55 to 155 degC, 0402 (1005 Metric)", Case/Package=0402, Max Operating Temperature=155°C, Min Operating Temperature=-55°C, Power=63mW, Voltage Rating=50V, Mounting Technology=SM, Pins=2, RoHS Compliant=True
U1: library part CMP-010-00014-2, "3-Axis Gyroscope, 3-Axis Accelerometer, 2.375 to 3.46 V, -40 to 105 degC, 24-Pin QFN, RoHS, Tape and Reel", Case/Package=QFN, Manufacturer=InvenSense, Max Operating Temperature=85°C, Max Supply Voltage=3.6V, Min Operating Temperature=-40°C, Min Supply Voltage=2.5V, Package Description="24-Pin Quad Flat No-lead Package, Body 4 x 4 mm, Pitch 0.5 mm", Package Quantity=5000, Package Reference=QFN-24, Datasheet URL=https://datasheet.ciiva.com/1513/1788002-1513632.pdf, Datasheet Version="Rev. 3.4, 08/2013", Interface=I2C, Mounting Technology=SM, Packaging=CutTape, Pins=24, RoHS Compliant=True, Sensor Type=Motion
U2: library part CMP-209535-000001-1, "LDO Voltage Regulators 1A, 3.3V", Dropout Voltage=1.1V, Manufacturer="Advanced Monolithic Systems", Max Junction Temp=+125°C, Max Power Dissipation=1.2W, Max Supply Voltage=15V, Nominal Supply Current=5mA, Output Current=1A, Output Voltage=3.3V, Package=AMS1117, Temperature="-40°C to +125°C", Temperature Range Low=-40°C, Automotive=No, Category=IC, ComponentLink2Description=Datasheet, ComponentLink2URL=http://www.advanced-monolithic.com/pdf/ds1117.pdf, Device Class L1="Integrated Circuits (ICs)", Device Class L2="Power Management ICs", Device Class L3="Voltage Regulators - Linear", Height=1.8mm, Ipc Land Pattern Name=SOT229P700X180-4, Lead Free=Yes, Manufacturer Part Number=AMS1117-3.3, Number Of Outputs=1, Octopart=https://octopart.com/ams1117-3.3-advanced+monolithic+systems-25899300, Output Type=Fixed, RoHS=TRUE, Standoff Height=0.64mm, Temperature Range High=+125°C
U3: library part CMP-031-00043-1, "High-performance access line, ARM Cortex-M4 core with DSP and FPU, 512 Kbytes Flash, 100 MHz CPU, ART Accelerator", Case/Package=None, Availability=Unavailable, Component Type=Standard, Design Item ID=STM32F411CEU6, MP=STM32F411CEU6, Pins=49, Price=None, Source=STM32F411CEU6.SchLib
X1: library part CMP-2000-07333-1, "MHz Range Crystal, 24 MHz, -40 to 85 degC, 4-Pin SMD, RoHS, Tape and Reel", Frequency=24MHz, Frequency Stability=10PPM, Load Capacitance=9pF, Manufacturer=Epson, Operating Temperature Range=-40Cto+85C, Package / Case=3.2mmx2.5mm, Package Description="4-Pin Surface Mount Device, Body 3.2 x 2.5 mm", Package Reference=TSX-3225, Brand=EpsonTiming, Datasheet URL=https://support.epson.biz/td/api/doc_check.php?dl=brief_FA-238V_en.pdf, Datasheet Version=12/2015, Drive Level=200uW, ESR=40Ohms, Factory Pack Quantity=250, Height=0.6mm, Length=3.2mm, Manufacturer URL=https://www.eea.epson.com/, Mounting Style=SMD/SMT, Mounting Technology=SurfaceMount, Packaging=Reel, Product Category=Crystals, RoHS=True, Series=TSX-3225, Termination Style=SMD/SMT, Tolerance=10PPM, Type=Crystal, Unit Weight=0.000564oz, Width=2.5mm

## Free pads (board coordinates)
  round 3.2 hole 3.2: 2(100.203,88.773) 3(100.203,54.356) 4(134.747,54.356) 5(134.747,88.773)

## Via types
v1: diameter 0.45, hole 0.2, L1 (Signal) to L4 (Signal), tented both sides, 35 vias
v2: diameter 0.5, hole 0.2, L1 (Signal) to L4 (Signal), 9 vias

## Nets (pads, with @x,y where several pads share a name; then routed paths per layer and width w, separated by ;. In a path a pad name is that pad's centre, name@x,y a point inside that pad or via, vN(x,y) a via of type N, cw(c..) or ccw(c..) an arc to the next point about the centre after c; other vN are vias at no path point)
3V3: C6.1 C7.2 C8.2 C9.2 C10.2 C11.2 C12.2 C13.2 C14.1 D1.2 J2.1 J3.1 R2.2 R4.2 R5.2 U1.8 U1.13 U2.2 U2.4 U3.1 U3.9 U3.24 U3.36 U3.48 | length 141
  L1 (Signal) w0.25: C7.2@103.022,88.773 v1(104.648,88.773) 105.436,88.773 105.627,88.581 105.887,88.581 U1.8 ; U1.13 106.912,83.359 C8.2 106.865,83.287 107.19,82.962 107.19,82.939 108.43,81.698 109.481,81.698 110.846,80.333 v1(110.871,80.333)
  L1 (Signal) w0.32: C7.2 103.022,88.773 103.312,89.063 103.385,89.063 103.632,89.31 103.632,89.383 105.249,91 122.995,91 J2.1 ; R2.2 R2.2@107.442,71.792 ; J3.1 108.117,56.756 107.977,56.896 106.68,56.896 105.177,58.399 105.177,58.965 C9.2 105.058,59.084 105.058,62.074 C10.2 105.058,62.132 105.058,64.614 C11.2 105.116,64.672 105.116,67.281 C12.2 105.145,69.464 107.442,71.761 R2.2@107.442,71.792 ; v1(108.3,70.4) 108.275,70.425 108.275,70.926 107.947,71.254 ; U3.9 109.299,71.464 108.74,71.464 108.523,71.247 108.16,71.247 107.987,71.247 107.947,71.254 ; U3.1 109.27,75.469 109.245,75.493 109.245,76.175 v1(109.22,76.2) 109.959,76.2 109.984,76.175 U3.48 ; R5.2@110.781,80.423 v1(110.871,80.333) 110.9,80.304 111.477,80.304 R4.2 ; U3.24 115.484,69.038 117.287,67.236 C13.2 119.664,65.514 C14.1 C14.1@120.281,65.931 ; U3.36@116.205,75.493 116.205,76.275 116.044,76.436 v1(116.044,76.471) 117.836,76.471 118.265,76.9 v1(118.3,76.9) ; C14.1@120.46,65.751 C14.1@120.281,65.931 ; U2.4 127.254,54.192 124.168,57.278 124.168,59.698 124.634,60.164 126.458,60.164 U2.2@127.254,59.368 ; U2.2 U2.2@127.254,59.368 ; R2.2@107.442,71.792 107.604,71.63 107.604,71.597 107.947,71.254 ; C14.1@120.281,65.931 124.081,65.931 D1.2 125.557,65.867 126.111,66.421 128.64,66.421 130.101,64.96 C6.1 130.101,63.31 127.254,60.463 U2.2@127.254,59.368
  L4 (Signal) w0.32: v1(104.648,88.773) 104.648,83.058 108.408,79.298 ; v1(108.3,70.4) 107.604,71.096 107.604,74.584 v1(109.22,76.2) 109.22,78.486 108.408,79.298 ; v1(115.6,69.3) 118.314,72.014 118.314,76.886 v1(118.3,76.9) ; v1(116.044,76.471) 113.521,78.994 112.21,78.994 v1(110.871,80.333) 110.846,80.308 110.846,79.92 110.224,79.298 108.408,79.298
5V: C3.1 C4.1 FB1.2 U2.3 | length 50.4
  L1 (Signal) w0.32: U2.3 124.964,59.236 126.288,57.912 134.874,57.912 136.017,59.055 136.017,65.599 134.687,66.929 132.588,66.929 132.133,67.384 C4.1 132.133,70.167 134.069,72.103 134.069,80.318 133.364,81.023 FB1.2 133.163,84.635 133.163,84.014 131.042,81.893 C3.1
GND: C1.2 C2.2 C3.2 C4.2 C5.1 C6.2 C7.1 C8.1 C9.1 C10.1 C11.1 C12.1 C13.1 C14.2 C15.1 C16.1 C17.1 C18.1 D2.1 J1.5 J2.5 J3.6 R1.1 R3.2 R6.2 U1.1 U1.9 U1.11 U1.18 U1.25 U2.1 U3.8 U3.23 U3.35 U3.47 U3.49 X1.2 X1.4 | length 103.3
  L1 (Signal) w0.25: 102.496,88.082 U1.9 ; C5.1 103.774,86.222 104.633,87.082 U1.11 106.987,87.082 107.162,86.907 v2(107.162,86.832) ; v1(104.9,71.5) 104.93,71.53 105.762,71.53 C15.1 ; C8.1 107.771,83.306 108.494,83.306 v1(108.5,83.3) ; v2(108.162,87.832) v2(109.162,88.832) ; v1(108.189,71.839) 108.226,71.882 108.472,71.882 108.539,71.949 109.098,71.949 109.103,71.954 109.289,71.954 109.289,71.958 U3.8 111.984,71.968 U3.49 ; v1(109.2,81.1) 109.21,81.09 109.21,80.412 R3.2 ; U1.18 C1.2@113.608,85.832 ; U1.1 109.412,90.057 109.821,90.466 114.938,90.466 116.728,88.677 121.658,88.677 122.135,89.154 v1(122.301,89.154) ; J3.6 114.367,62.827 v1(114.681,63.141) ; 114.999,68.714 U3.23@114.999,69.288 ; U3.35 116.174,74.979 116.684,74.979 117.062,75.356 117.062,75.562 v1(117.1,75.6) ; v1(124.5,73.9) 124.5,73.887 R6.2 ; C3.2 128.857,79.143 v1(129.7,78.3) 129.716,78.284 132.834,78.284 J1.5 ; R1.1 126.943,65.2 v1(128.2,65.2) ; C2.2 128.9,70.883 v1(128.9,69.2) 128.938,69.162 129.349,69.162 133.551,64.96 C6.2 ; v1(129.5,60.4) 129.5,59.346 U2.1 ; C4.2 135.8,69.125 135.8,67.254 136.2,66.854 v1(136.2,66.8)
  L1 (Signal) w0.32: C18.1 99.619,69.465 v1(99.619,74.381) 99.619,74.506 100.284,75.171 100.284,75.23 100.554,75.5 100.554,75.791 101.219,76.456 X1.4 101.346,76.708 v1(104.481,76.708) ; 102.496,88.082 102.362,87.947 ; C5.1 102.907,86.312 102.809,86.312 102.362,86.759 102.362,87.947 ; C7.1 102.972,89.673 102.682,89.383 102.609,89.383 102.362,89.136 102.362,87.947 ; C9.1 105.958,59.084 105.958,62.074 C10.1 105.958,62.132 105.958,64.614 C11.1 106.016,64.672 106.016,67.281 v1(106.045,67.31) ; U1.25@107.267,86.591 107.267,86.642 107.457,86.832 v2(108.162,86.832) v2(109.162,86.832) ; v1(109.855,77.089) 109.88,77.064 110.128,77.064 110.479,76.713 U3.47@110.479,76.424 ; C1.2@113.608,85.832 v1(113.75,85.974) ; 114.999,68.714 115.164,68.549 115.164,67.97 v1(115.189,67.945) ; C13.1 117.262,64.614 116.329,63.681 115.221,63.681 v1(114.681,63.141) 120.041,63.141 C14.2
  other v1: 122.301,78.613
  other v2: 107.162,87.832 109.162,87.832 107.162,88.832 108.162,88.832
IMU_INT: U1.12 U3.45 | length 12.7
  L1 (Signal) w0.32: 106.172,86.396 106.172,81.552 109.365,78.359 109.833,78.359 111.479,76.713 111.479,76.154 U3.45
IMU_SCL: R4.1 U1.23 U3.42 | length 17.3
  L1 (Signal) w0.25: U1.23 110.697,88.582 113.902,88.582 114.575,87.908 114.575,79.856 113.149,78.43 113.126,78.43 112.801,78.105 R4.1 112.776,77.521 112.999,77.298 U3.42@112.999,76.149
IMU_SDA: R5.1 U1.24 U3.43 | length 15.9
  L1 (Signal) w0.25: R5.1@110.871,79.458 111.021,79.308 111.065,79.308 112.176,78.197 112.176,77.485 112.479,77.182 U3.43@112.479,76.154
  L1 (Signal) w0.32: v1(109.982,79.883) 110.017,79.883 110.405,79.495 110.809,79.495 R5.1 ; 110.137,89.257 110.211,89.331 110.211,89.891 v1(110.236,89.916) ; U3.43@112.479,76.154 U3.43
  L4 (Signal) w0.32: v1(109.982,79.883) 110.236,80.137 v1(110.236,89.916)
MCU_BOOT0: R3.1 U3.44 | length 4.3
  L1 (Signal) w0.25: R3.1@109.322,79.604 111.989,76.936 U3.44@111.989,76.435
  L1 (Signal) w0.32: R3.1 R3.1@109.245,79.502
MCU_LED_A: U3.25
MCU_NRST: C15.2 J2.3 R2.1 U3.7 | length 29.2
  L1 (Signal) w0.32: C15.2 105.792,72.46 R2.1 R2.1 ; R2.1@107.45,72.469 107.971,72.469 108.414,72.467 v1(108.356,72.467) 108.956,72.473 109.299,72.473 U3.7
  L4 (Signal) w0.32: v1(108.356,72.467) 110.81,72.467 110.845,72.432 112.832,72.432 117.144,76.744 117.144,81.33 123.571,87.757 v1(123.571,89.027)
MCU_OSC_IN: C17.2 U3.5 X1.1 | length 13.8
  L1 (Signal) w0.32: X1.1 99.667,76.629 99.667,77.574 100.326,78.232 104.969,78.232 105.675,77.526 105.675,76.864 C17.2 105.831,75.404 106.018,75.216 108.267,73.701 108.74,73.474 U3.5
MCU_PA4: J3.2 U3.14 | length 13.3
  L1 (Signal) w0.32: J3.2 109.347,56.535 109.347,59.69 110.097,60.44 110.097,68.321 110.479,68.703 110.479,69.284 U3.14
MCU_PA5: J3.3 U3.15 | length 12.9
  L1 (Signal) w0.25: 110.617,68.106 110.984,68.473 U3.15
  L1 (Signal) w0.32: J3.3 110.617,68.106
MCU_PA6: J3.4 U3.16 | length 12.9
  L1 (Signal) w0.32: U3.16 111.484,63.301 111.867,62.918 J3.4 ; J3.4@111.877,56.885 J3.4@111.887,56.895
MCU_PA7: J3.5 U3.17 | length 13.2
  L1 (Signal) w0.26: U3.17 111.984,63.676 113.117,62.543 J3.5
MCU_SWCLK: J2.4 U3.37 | length 15.1
  L1 (Signal) w0.25: U3.37 115.484,79.162 123.568,87.246 123.568,87.881 J2.4
MCU_SWDIO: J2.2 U3.32 | length 18.7
  L1 (Signal) w0.25: U3.32 117.284,73.469 v1(117.729,73.914) ; v1(117.729,80.518) 120.896,83.685 120.896,83.701 121.087,83.891 121.102,83.891 124.648,87.437 124.648,87.525 124.841,87.718 J2.2
  L4 (Signal) w0.25: v1(117.729,73.914) v1(117.729,80.518)
MCU_SWO: J2.6 U3.39 | length 15
  L1 (Signal) w0.25: U3.39 114.484,79.051 122.301,86.868 J2.6
NetC1_1: C1.1 U1.20 | length 3.7
  L1 (Signal) w0.25: U1.20 C1.1@113.508,87.082
  L1 (Signal) w0.32: C1.1@113.508,87.082 C1.1
NetC5_2: C5.2 U1.10 | length 3.4
  L1 (Signal) w0.25: 103.482,87.562 103.501,87.582 U1.10
  L1 (Signal) w0.32: C5.2 103.087,87.212 103.112,87.212 103.462,87.562 103.482,87.562
NetC16_2: C16.2 U3.22 | length 3.5
  L1 (Signal) w0.32: U3.22 114.479,69.284 114.479,66.093 C16.2
NetD1_1: D1.1 R1.2 | length 2.8
  L1 (Signal) w0.32: D1.1 124.158,63.654 R1.2
NetD3_1: D3.1 R6.1 | length 3.2
  L1 (Signal) w0.25: D3.1 125.547,71.29 R6.1
NetD3_2: D3.2 U3.26 | length 7.5
  L1 (Signal) w0.32: U3.26 119.456,70.469 122.327,73.34 122.327,73.39 D3.2
NetR7_2: R7.2 U3.6 | length 6.6
  L1 (Signal) w0.25: 107.561,73.332 108.51,73.017 108.537,72.99 108.994,72.979 U3.6
  L1 (Signal) w0.32: R7.2 103.632,71.559 103.797,71.724 104.056,71.724 105.029,72.697 105.029,72.838 105.523,73.332 107.561,73.332
USB_D_N: J1.2 U3.33 | length 17.7
  L1 (Signal) w0.26: U3.33 116.464,73.969 116.482,73.987 117.017,73.987 119.442,76.412 132.756,76.412 J1.2
USB_D_P: J1.3 U3.34 | length 17.7
  L1 (Signal) w0.26: U3.34 116.464,74.468 116.482,74.45 116.825,74.45 119.25,76.876 132.756,76.876 J1.3
VBUS: C2.1 D2.2 FB1.1 J1.1 | length 24.8
  L1 (Signal) w0.32: D2.2 124.079,82.677 126.238,84.836 v1(131.812,84.836) ; C2.1 129.105,73.638 131.136,75.669 v1(132.849,75.669)
  L4 (Signal) w0.32: v1(131.812,84.836) 131.812,76.706 v1(132.849,75.669)
XTAL_IN: C18.2 R7.1 X1.3 | length 8.5
  L1 (Signal) w0.32: C18.2 101.092,74.254 X1.3 101.219,74.256 103.065,72.41 103.485,72.41 R7.1@103.632,72.263
pads on no net: J1.4 J1.6 J1.7 J1.8 J1.9 J1.10 J1.11 J2.MH J3.7 J3.8 U1.2 U1.3 U1.4 U1.5 U1.6 U1.7 U1.14 U1.15 U1.16 U1.17 U1.19 U1.21 U1.22 U3.2 U3.3 U3.4 U3.10 U3.11 U3.12 U3.13 U3.18 U3.19 U3.20 U3.21 U3.27 U3.28 U3.29 U3.30 U3.31 U3.38 U3.40 U3.41 U3.46

## Polygon pours and split planes (outlines as drawn)
GND on L2 (GND) "NONET_L-01_P-001" (solid, shelved, pour order 1): 97.79,91.518 97.79,51.816 137.033,51.816 137.033,91.518
GND on L2 (GND) "NONET_L-01_P-001" (solid, shelved, pour order 0): 97.79,91.518 97.79,51.816 137.033,51.816 137.033,91.518
GND on L3 (GND) "NONET_L-01_P-001" (solid, shelved, pour order 2): 97.79,91.518 97.79,51.816 137.033,51.816 137.033,91.518

## Silkscreen, mask and mechanical layers (free items; w line width, h text height)
Mechanical 1:
  the board outline again, w0.254